# Altium PCB 如意硬件电源模块0831.PcbDoc
Units mm, origin at the board's own origin, x right, y up, seen from the top; angles counter-clockwise.
Board outline 40 x 49 mm, 2 copper layers (Top Layer, Bottom Layer); 30 components, 15 nets, 85 pads, 62 vias.
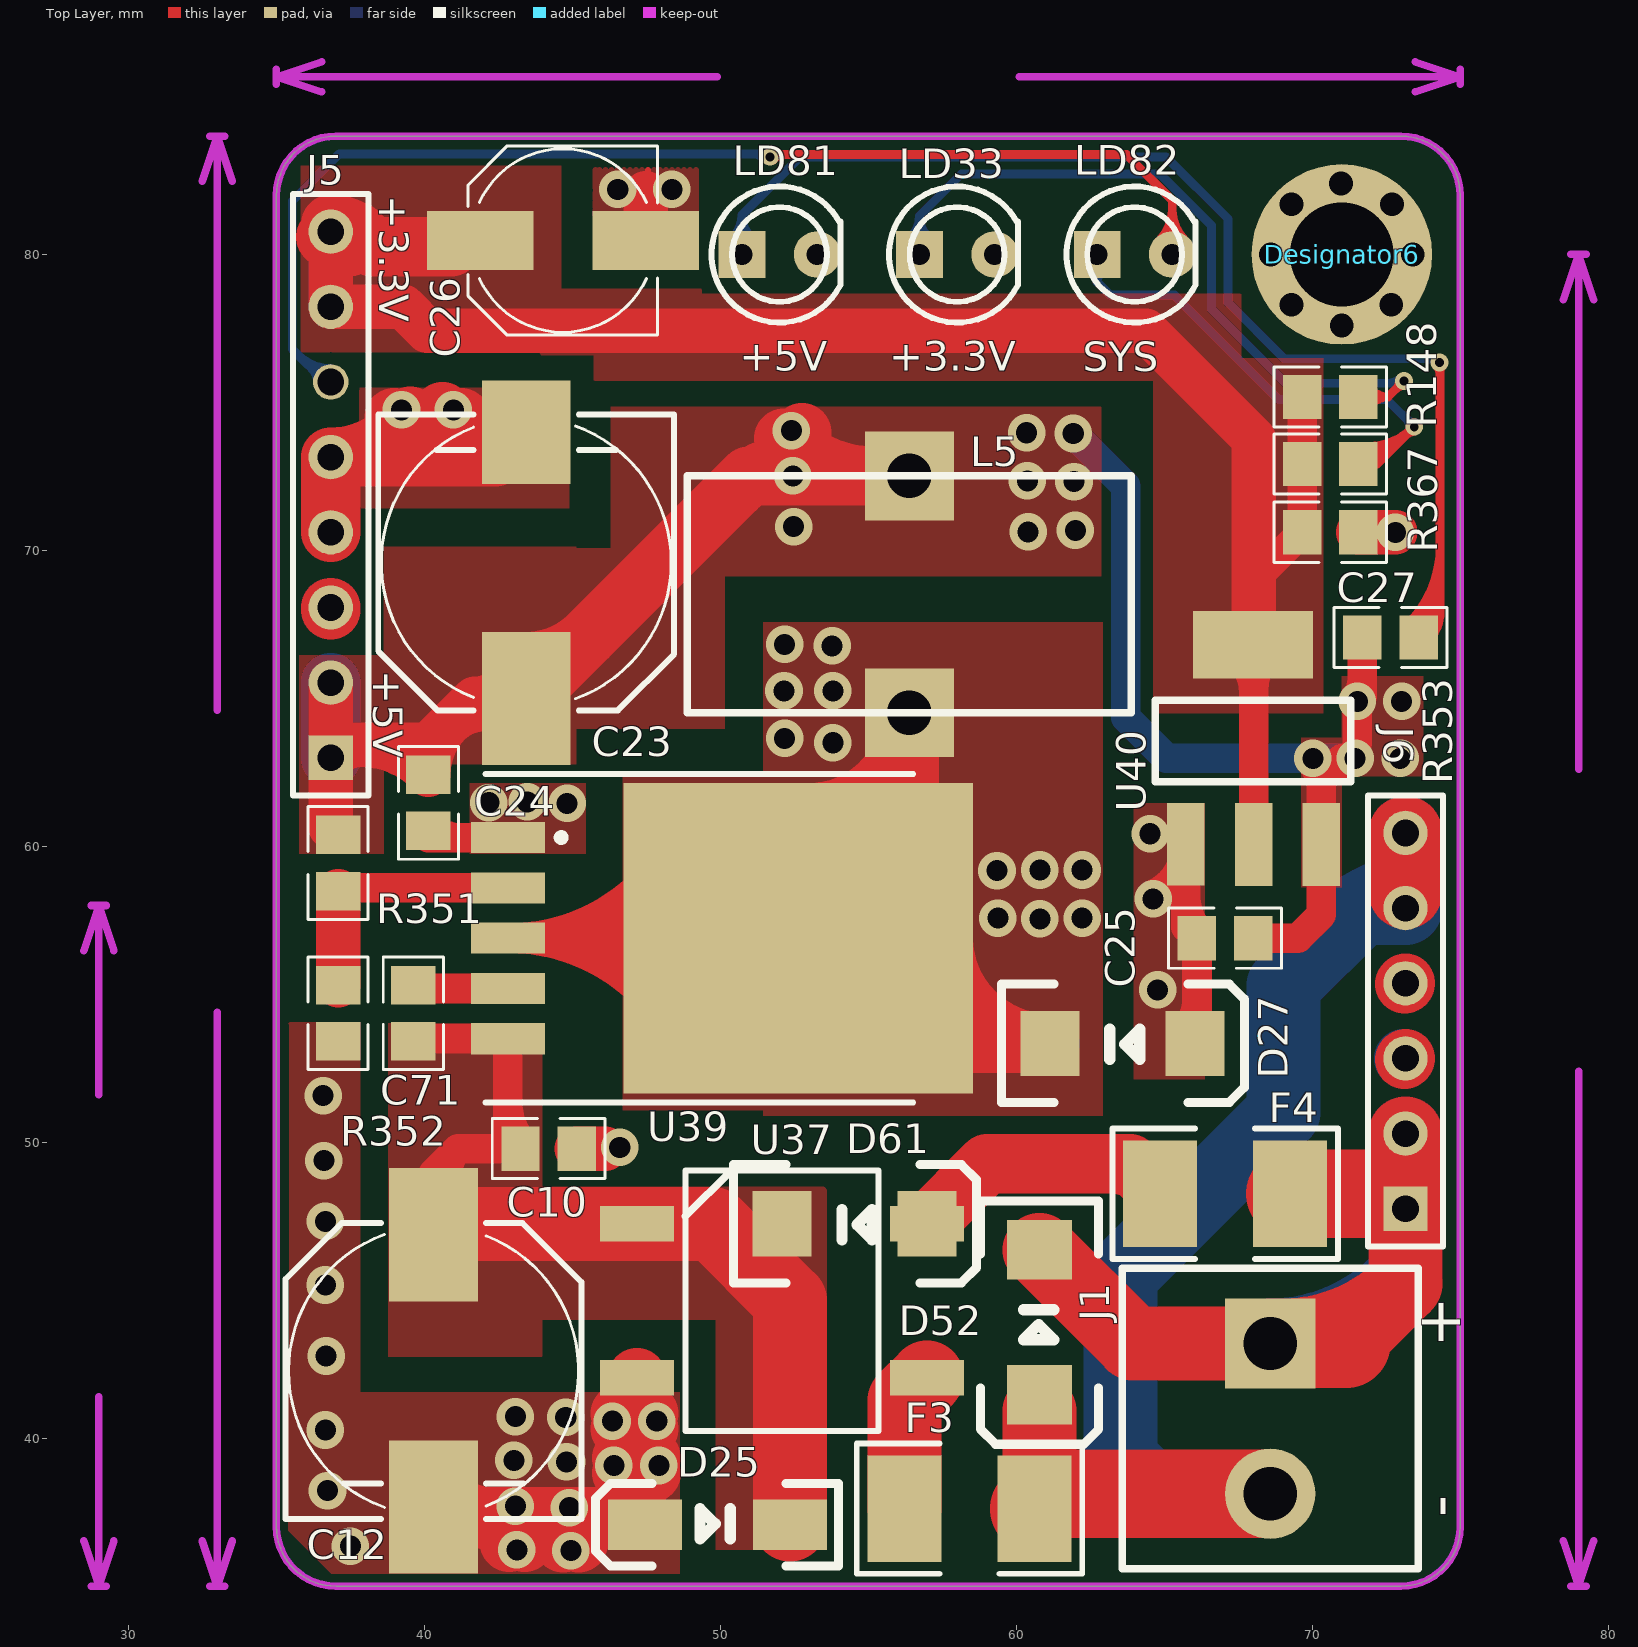
[diagram p0: Top Layer view]
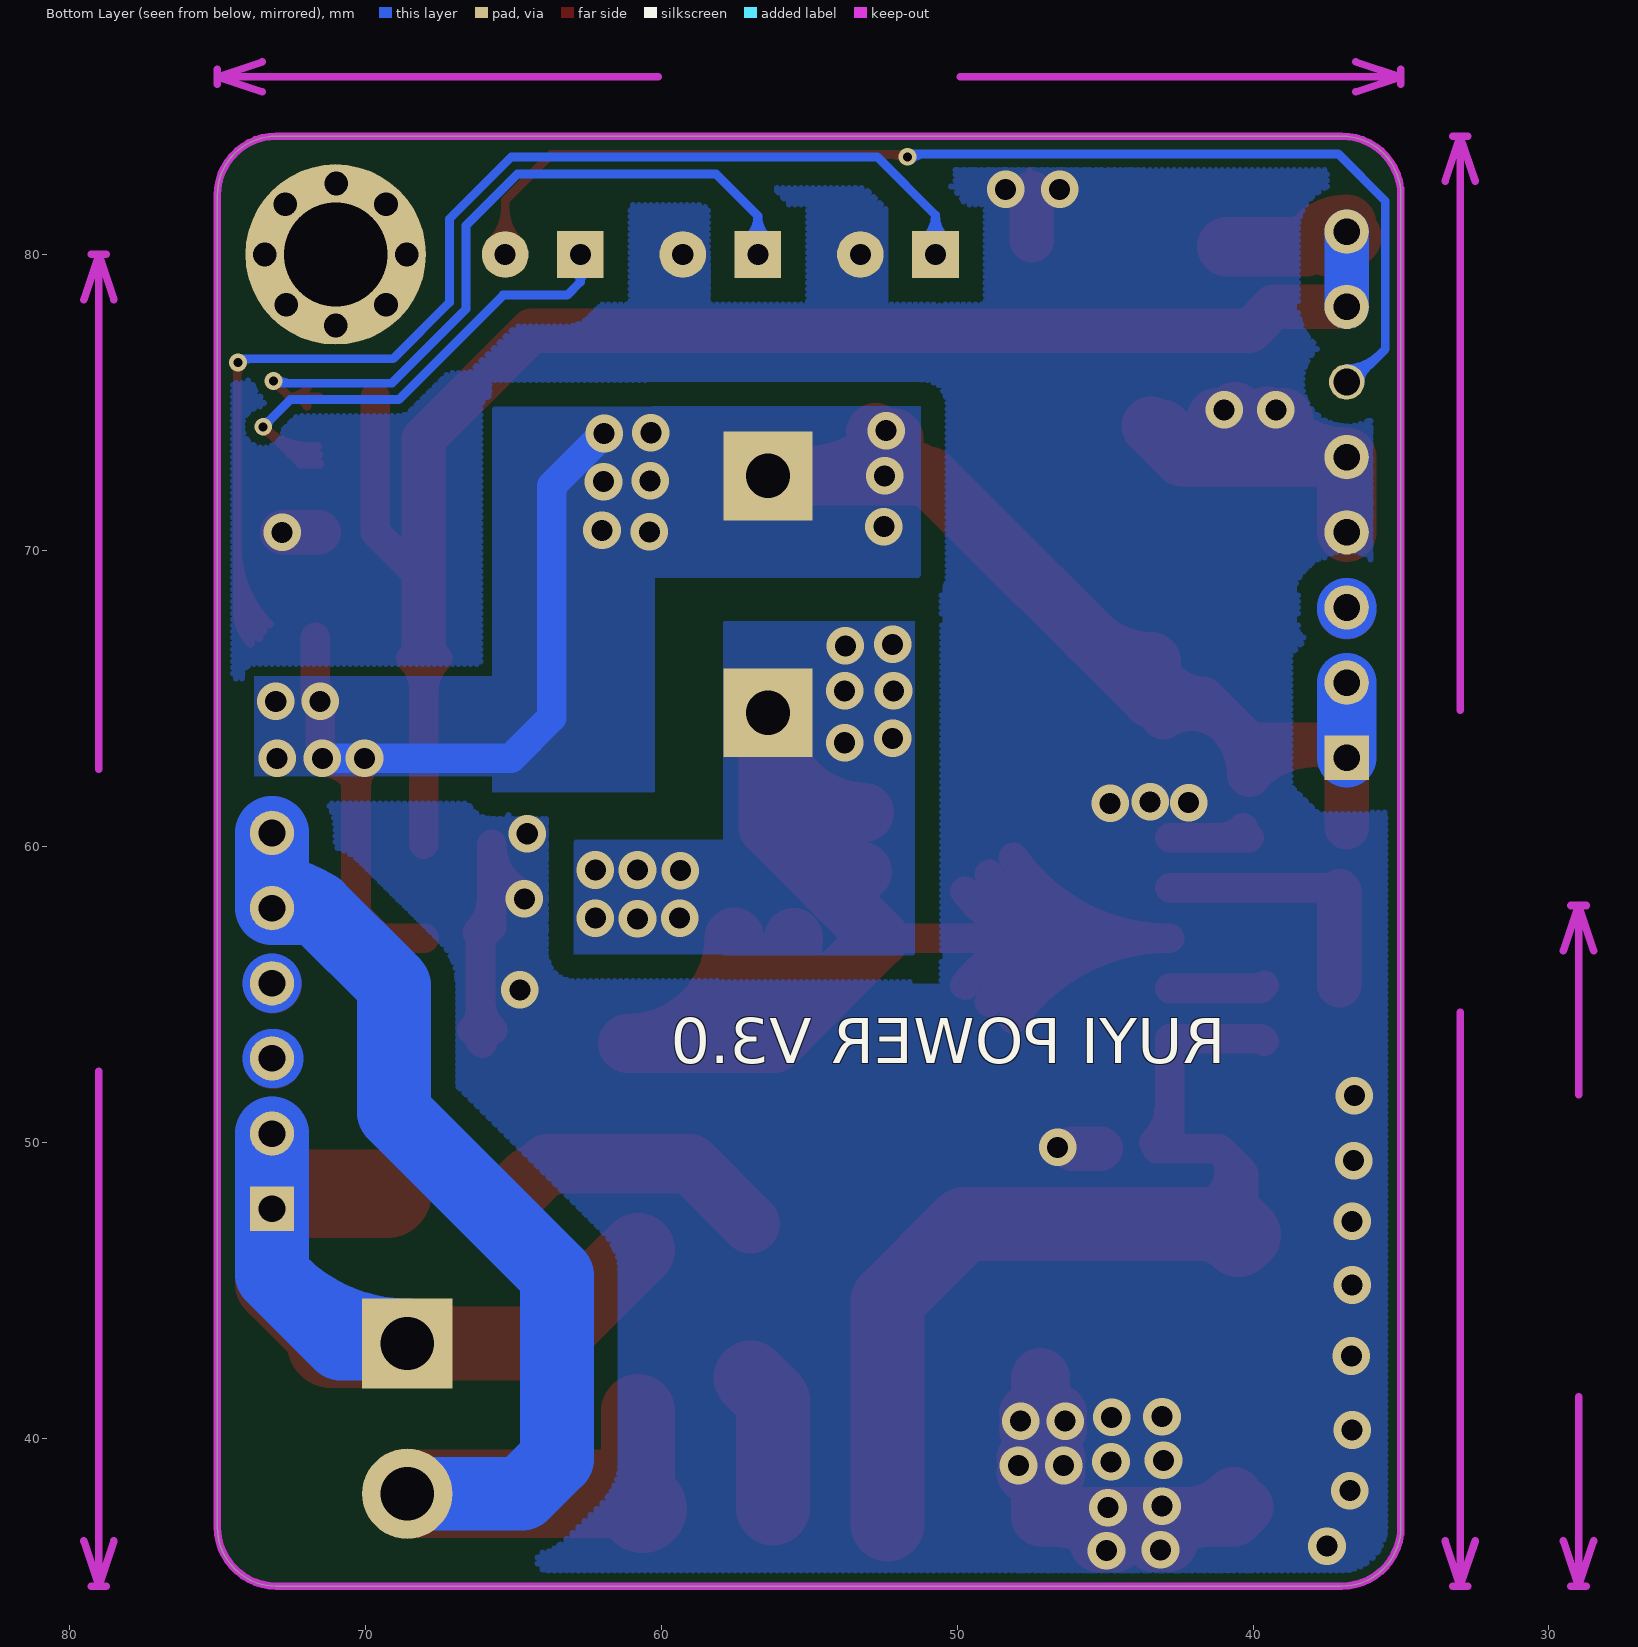
[diagram p1: Bottom Layer view, seen from below]

## Layer stack, top to bottom
Top Layer: signal copper 0.0356
Dielectric: dielectric 0.32, FR-4, Dk 4.8
Bottom Layer: signal copper 0.0356

## Board outline
35,37 35,82 cw(c37,82) 37,84 73,84 cw(c73,82) 75,82 75,37 cw(c73,37) 73,35 37,35 cw(c37,37)

## Design rules (kind name [scope] priority, off if disabled: settings)
Clearance Clearance_1 [InPolygon] p1: gap=0.3
Clearance [All] p2: gap=0.254
ComponentClearance [All] p1: gap=0 collisioncheckmode=3 verticalgap=0 showdistances=FALSE
FabricationTestpoint [(IsPad And (OnTopLayer Or OnBottomLayer))] p1: side=3 testpointundercomponent=TRUE minsize=1.016 maxsize=2.54 preferedsize=1.524 minholesize=0 maxholesize=1.016 preferedholesize=0.813 testpointgrid=0.025 allowsidetop=TRUE allowsidebottom=TRUE usegrid=TRUE gridtolerance=0
PolygonConnect PolygonConnect_1 [IsVia Or IsSMTPin Or IsThruPin vs IsPoly] p1: connectstyle=Direct reliefconductorwidth=0.254 reliefentries=4 polygonreliefangle="90 Angle"
PolygonConnect [All] p2: connectstyle=Relief reliefconductorwidth=0.254 reliefentries=4 polygonreliefangle="90 Angle"
RoutingVias [All] p1: holewidth=0.711 width=1.27 viastyle="Through Hole" minholewidth=0.3 minwidth=0.6 maxholewidth=0.711 maxwidth=1.27
SilkToSilkClearance [All] p1: silktosilkclearance=0
SilkscreenOverComponentPads [All] p1: minsilkscreentomaskgap=0
SolderMaskExpansion [All] p1: expansion=0.102
Width Width_2 [InNet('VS+')  Or InNet('VS-')  Or InNet(NetF3_2)  Or InNet('+24V')] p1: maxlimit=3 minlimit=1 preferedwidth=2
Width Width_1 [All] p2: maxlimit=2 minlimit=0.3 preferedwidth=1.5
24 further rules are at their usual default settings.

## Components (designator, comment, footprint, x,y, rotation, side; value= is the part's Value field where it differs from the comment)
C10 "1uf" 0805-1 44.196,49.784 r0 top
C12 "220uF/50V" C-RB-S10#1 40.307,42.272 r270 top
C23 "220uf/50V" C-RB-S10#2 43.438,69.596 r90 top
C24 "1uf" 0805-1 40.132,61.468 r270 top
C25 "0.1uf" 0805-1 67.056,56.896 r0 top
C26 "10uf" C-RB-S6 44.679,80.472 r0 top
C27 "0.1uf" 0805-1 70.612,70.612 r180 top
C71 "1uf" 0805-1 39.624,54.356 r90 top
D25 "FR104" DIODETP-5 47.452,37.075 r180 top
D27 "IN5824" SMB 66.04,53.34 r0 top
D52 "P6KE33CA" SMB 60.785,41.464 r270 top
D61 "IN4007" SMB 56.986,47.244 r0 top
Designator6 "Comment" Hole-3MM 71,80 r0 top
F3 "" 1812 58.42,37.617 r180 top
F4 "" 1812 67.056,48.26 r180 top
J1 "CON2" JK126-2 68.58,43.23 r270 top
J5 "Header 8" HDR1X8 36.834,62.992 r90 top
J6 "Header 6" HDR1X6 73.152,47.752 r90 top
L5 "47uH/5A" L1-47uH/5A 56.388,64.516 r90 top
LD33 "LED" LED_Z1 58,80 r180 top
LD81 "LED" LED_Z1 52,80 r180 top
LD82 "LED" LED_Z1 64,80 r180 top
R148 "330" 0805-1 70.612,75.184 r0 top
R351 "10K" 0805-1 37.084,59.436 r270 top
R352 "3.3K" 0805-1 37.084,54.356 r270 top
R353 "510" 0805-1 72.644,67.056 r0 top
R367 "220" 0805-1 70.612,72.919 r0 top
U37 "DB157S" SOP-DBS 47.186,47.244 r0 top
U39 "XL4015" TO-263-5 47.244,56.896 r270 top
U40 "LM1117-3.3" ASM1117 68.072,63.5 r0 top

## Footprints (in the part's own frame and the unit in brackets; to place one, negate y for a bottom-side part, rotate by r counter-clockwise, add the part's x,y. Pads: shape width x height; smd on the part's side, far side on the other; paste and mask are expansions set on the pad)
0805-1 [mm] "贴片带丝印"
  rect 1.3x1.5 smd: 1(-0.95,0) 2(0.95,0)
  silkscreen extent -1.91,-1.02 1.91,1.02, body extent -1.14,-0.51 1.14,0.51, height 1
1812 [mm] "保险丝"
  rect 2.5x3.6 smd: 1(-2.2,0) 2(2.2,0)
  silkscreen extent -3.81,-2.2 3.81,2.2, body extent -2.54,-1.65 2.67,1.65, height 1.2
ASM1117 [mil]
  rect 50x110 smd: 1(-92.17,-135.19) 2(-1.93,-135.31) 3(88.23,-135.31)
  rect 160x90 smd: 4(-2.72,130.44)
  silkscreen extent -133,-52 127,57
C-RB-S6 [mm] "贴片电解"
  rect 3.6x2 smd: 1(-2.794,0) 2(2.794,0)
  silkscreen extent -3.2,-3.2 3.2,3.2
C-RB-S10#1 [mm] "贴片电解"
  rect 4.5x3 smd: 1(-4.6,0) 2(4.6,0)
  silkscreen extent -5,-5 5,5
C-RB-S10#2 [mm] "贴片电解"
  rect 4.5x3 smd: 1(-4.6,0)
  rect 3.5x3 smd: 2(4.4,0)
  silkscreen extent -5,-5 5,5
DIODETP-5 [mm]
  rect 2.5x1.702 smd: 1(0,0) 2(-4.9,0)
  silkscreen extent -6.54,-1.39 1.67,1.4
HDR1X6 [mm] "Connector; Header; 6 Position"
  rect 1.5x1.5 hole 0.9: 1(0,0)
  round 1.5 hole 0.9: 2(2.54,0) 3(5.08,0) 4(7.62,0) 5(10.16,0) 6(12.7,0)
  silkscreen extent -1.27,-1.27 13.97,1.27
HDR1X8 [mm] "Connector; Header; 8 Position"
  rect 1.5x1.5 hole 0.9: 1(0,0)
  round 1.5 hole 0.9: 2(2.54,0) 3(5.08,0) 4(7.62,0) 5(10.16,0) 7(15.24,0) 8(17.78,0)
  round 1.2 hole 0.9: 6(12.7,0)
  silkscreen extent -1.27,-1.27 19.05,1.27
Hole-3MM [mm]
  round 6.1 hole 3.5: 0(0,0)
  round 1 hole 0.8: 2(-2.4,0) 3(-0.025,2.4) 4(2.4,0) 5(0,-2.4) 6(-1.7,1.7) 7(1.7,1.7) 8(1.675,-1.7) 9(-1.7,-1.7)
JK126-2 [mil]
  rect 120x120 hole 70.87: 1(1.13,0)
  round 120 hole 70.87: 2(201.13,0)
  silkscreen extent -99,-197 301,197
L1-47uH/5A [mm]
  rect 3x3 hole 1.5: 1(0,0) 2(8,0)
  silkscreen extent 0,-7.5 8,7.5
LED_Z1 [mil] "直径3MM二极管"
  rect 62x62 hole 28: 1(50,0)
  round 62 hole 28: 2(-50,0)
  silkscreen extent -81,-91 90,91
SMB [mm]
  rect 2x2.2 smd: 1(0,0) 2(-4.9,0)
  silkscreen extent -6.54,-1.99 1.67,2
SOP-DBS [mm]
  rect 2.5x1.2 smd: 1(0,0) 2(0,-5.2) 3(9.8,-5.2) 4(9.8,0)
  silkscreen extent 1.64,-7 8.17,1.8
TO-263-5 [mm] "贴片LM2596"
  rect 1.05x2.5 smd: 1(-3.4,-4.425) 2(-1.7,-4.425) 3(0,-4.425) 4(1.7,-4.425) 5(3.4,-4.425)
  rect 10.5x11.8 smd: 6(0,5.387)
  silkscreen extent -5.55,-5.18 5.55,9.28, body extent -5.33,-4.7 5.33,10.29, height 3

## Part data
C10 C24 C71: library part CAP, "Capacitor"
C12 C23: library part ELECTRO1, "Electrolytic Capacitor"
C25 C27: library part CAP0, "CAP"
C26: library part ECAP
D25 D61: library part DIODE, "Diode"
D27: library part ZENER2, "Zener Diode"
D52: library part TVS
F3 F4: library part FUSE1, "Fuse"
J1: "Connector"
J5: "Header, 8-Pin"
J6: "接插件"
L5: library part INDUCTOR
R148 R351 R352 R353 R367: library part RES-2
U37: library part MB6S
U40: library part LM1117

## Via types
v1: diameter 1.27, hole 0.711, Top Layer to Bottom Layer, 58 vias
v2: diameter 0.6, hole 0.3, Top Layer to Bottom Layer, 4 vias

## Nets (pads, with @x,y where several pads share a name; then routed paths per layer and width w, separated by ;. In a path a pad name is that pad's centre, name@x,y a point inside that pad or via, vN(x,y) a via of type N, cw(c..) or ccw(c..) an arc to the next point about the centre after c; other vN are vias at no path point)
+3.3V: C26.1 C27.2 J5.7 J5.8 R148.1 R367.1 U40.2 U40.4 | length 82
  Top Layer w1: U40.2 68.023,66.05 U40.4@68.023,66.813 ; 68.023,68.973 C27.2 R367.1 R148.1 ; U40.4@67.548,66.359 cw(c66.402,65.213) 68.023,65.213 ; U40.4@67.548,66.359 cw(c66.402,65.213) 68.023,65.213 ; U40.4@67.548,66.359 cw(c66.402,65.213) 68.023,65.213 ; 68.023,65.309 cw(c69.507,65.309) U40.4@68.458,66.359 ; 68.023,65.309 cw(c69.507,65.309) U40.4@68.458,66.359 ; 68.023,65.309 cw(c69.507,65.309) U40.4@68.458,66.359
  Top Layer w1.5: J5.8 J5.7 39.293,78.232 40.1,77.425 64.375,77.425 68.023,73.777 68.023,68.973 U40.4@68.023,66.813
  Top Layer w2: 37.719,80.772 38.227,80.264 C26.1@40.894,80.264 ; J5.8@36.657,80.595 ccw(c37.457,81.395) 37.457,80.264 ; J5.8@36.657,80.595 ccw(c37.457,81.395) 37.457,80.264 ; J5.8@36.657,80.595 ccw(c37.457,81.395) 37.457,80.264 ; J5.8@36.657,80.595 ccw(c37.457,81.395) 37.457,80.264 ; J5.8@36.657,80.595 ccw(c37.457,81.395) 37.457,80.264 ; J5.8@36.657,80.595 ccw(c37.457,81.395) 37.457,80.264 ; J5.8@36.834,81.022 cw(c36.834,79.489) 37.918,80.573 ; J5.8@36.834,81.022 cw(c36.834,79.489) 37.918,80.573 ; J5.8@36.834,81.022 cw(c36.834,79.489) 37.918,80.573 ; J5.8@36.834,81.022 cw(c36.834,79.489) 37.918,80.573 ; J5.8@36.834,81.022 cw(c36.834,79.489) 37.918,80.573 ; J5.8@36.834,81.022 cw(c36.834,79.489) 37.918,80.573
  Bottom Layer w1.5: J5.7 J5.8
+5V: C23.1 C24.1 C25.2 J5.1 J5.2 L5.2 R351.1 R353.1 U40.3 | length 149.1
  Top Layer w1: C25.2 69.521,56.896 70.313,57.688 U40.3 70.313,62.263 71.025,62.975 v1(71.45,62.975) ; v1@71.525,63.475 v1(71.525,64.9) 71.694,65.069 R353.1 ; v1@69.93,62.88 cw(c69.004,61.954) 70.313,61.954 ; v1@69.93,62.88 cw(c69.004,61.954) 70.313,61.954 ; v1@69.93,62.88 cw(c69.004,61.954) 70.313,61.954 ; 70.494,62.444 cw(c71.45,61.488) v1@71.45,62.84 ; 70.494,62.444 cw(c71.45,61.488) v1@71.45,62.84 ; 70.494,62.444 cw(c71.45,61.488) v1@71.45,62.84 ; v1@71.43,64.995 ccw(c70.791,65.634) 71.694,65.634 ; v1@71.43,64.995 ccw(c70.791,65.634) 71.694,65.634 ; v1@71.43,64.995 ccw(c70.791,65.634) 71.694,65.634
  Top Layer w1.5: R351.1@36.834,60.636 J5.1 ; J5.2 J5.1 ; C23.1 41.694,64.996 ; J5.1 cw(c37.901,61.925) 37.901,63.434 ; J5.1 cw(c37.901,61.925) 37.901,63.434 ; J5.1 cw(c37.901,61.925) 37.901,63.434 ; J5.1 37.276,63.434 40.132,63.434 41.694,64.996 ; 37.821,63.434 cw(c37.821,60.207) C24.1@40.103,62.489 ; 37.821,63.434 cw(c37.821,60.207) C24.1@40.103,62.489 ; 37.821,63.434 cw(c37.821,60.207) C24.1@40.103,62.489 ; C24.1 cw(c42.585,62.418) 40.85,64.152 ; C24.1 cw(c42.585,62.418) 40.85,64.152 ; C24.1 cw(c42.585,62.418) 40.85,64.152 ; 40.822,64.124 cw(c42.077,62.869) C23.1@43.034,64.364 ; 40.822,64.124 cw(c42.077,62.869) C23.1@43.034,64.364 ; 40.822,64.124 cw(c42.077,62.869) C23.1@43.034,64.364 ; 40.858,64.16 cw(c42.986,62.032) C23.1@43.588,64.981 ; 40.858,64.16 cw(c42.986,62.032) C23.1@43.588,64.981 ; 40.858,64.16 cw(c42.986,62.032) C23.1@43.588,64.981 ; 41.694,64.996 cw(c41.694,63.344) C23.1@42.894,64.48 ; 41.694,64.996 ccw(c41.694,66.648) C23.1@42.894,65.512 ; 41.694,64.996 ccw(c41.694,66.648) C23.1@42.894,65.512 ; 41.694,64.996 cw(c41.694,63.344) C23.1@42.894,64.48 ; 41.694,64.996 ccw(c41.694,66.648) C23.1@42.894,65.512 ; 41.694,64.996 cw(c41.694,63.344) C23.1@42.894,64.48
  Top Layer w2: C23.1 50.958,72.516 ; L5.2 50.958,72.516 ; C23.1@43.438,66.246 ccw(c43.438,69.264) 45.572,67.13 ; C23.1@43.438,66.246 ccw(c43.438,69.264) 45.572,67.13 ; C23.1@43.438,66.246 ccw(c43.438,69.264) 45.572,67.13 ; 50.526,72.084 cw(c52.45,70.16) v1@52.45,72.881 ; 50.526,72.084 cw(c52.45,70.16) v1@52.45,72.881 ; 50.526,72.084 cw(c52.45,70.16) v1@52.45,72.881 ; 50.526,72.084 cw(c52.45,70.16) v1@52.45,72.881 ; 50.526,72.084 cw(c52.45,70.16) v1@52.45,72.881 ; 50.526,72.084 cw(c52.45,70.16) v1@52.45,72.881 ; 50.958,72.516 ccw(c50.958,74.355) v1@52.757,73.974 ; 50.958,72.516 ccw(c50.958,74.355) v1@52.757,73.974 ; 50.958,72.516 ccw(c50.958,74.355) v1@52.757,73.974 ; v1@52.142,73.792 ccw(c55.222,76.872) L5.2@55.222,72.516 ; v1@52.142,73.792 ccw(c55.222,76.872) L5.2@55.222,72.516 ; v1@52.142,73.792 ccw(c55.222,76.872) L5.2@55.222,72.516
  Bottom Layer w1: v1(61.925,73.95) 63.7,72.175 63.7,64.35 65.075,62.975 v1(70.025,62.975) v1(71.45,62.975)
  Bottom Layer w2: J5.1 J5.2
  other v1: 72.975,62.975 73.025,64.9 60.4,70.625 62,70.675 52.475,70.8 61.95,72.325 60.375,72.35 52.45,72.516 60.35,73.975 52.4,74.05
+24V: C10.1 C12.1 C71.1 D25.2 D61.2 U37.1 U39.5 | length 47
  Top Layer w1: C71.1 39.714,53.496 U39.5 42.819,50.211 C10.1 41.134,49.784 ; C12.1 40.307,48.957 41.134,49.784 ; C12.1@41.071,48.268 cw(c41.927,48.991) 41.134,49.784 ; C12.1@41.071,48.268 cw(c41.927,48.991) 41.134,49.784 ; C12.1@41.071,48.268 cw(c41.927,48.991) 41.134,49.784 ; 42.819,51.277 ccw(c44.639,51.277) C10.1@43.352,49.99 ; 42.819,51.277 ccw(c44.639,51.277) C10.1@43.352,49.99 ; 42.819,51.277 ccw(c44.639,51.277) C10.1@43.352,49.99
  Top Layer w2.5: C12.1 40.679,47.244 U37.1 49.756,47.244 52.352,44.648 D25.2 ; C12.1@40.484,46.695 cw(c41.809,45.37) 41.809,47.244 ; C12.1@40.484,46.695 cw(c41.809,45.37) 41.809,47.244 ; C12.1@40.484,46.695 cw(c41.809,45.37) 41.809,47.244
GND: C10.2 C12.2 C23.2 C24.2 C25.1 C26.2 C27.1 D25.1 D27.1 J5.4 J5.5 LD33.2 LD81.2 R352.2 U37.2 U39.1 U40.1 | length 165.4
  Top Layer w1: C24.2@40.132,60.296 U39.1 ; D27.1 66.106,53.406 C25.1 65.731,57.271 U40.1 ; C24.2@40.338,60.624 ccw(c41.13,61.416) 41.13,60.296 ; C24.2@40.338,60.624 ccw(c41.13,61.416) 41.13,60.296 ; C24.2@40.338,60.624 ccw(c41.13,61.416) 41.13,60.296 ; v1@64.574,58.35 ccw(c63.88,60.066) U40.1 ; v1@64.574,58.35 ccw(c63.88,60.066) U40.1 ; v1@64.574,58.35 ccw(c63.88,60.066) U40.1 ; D27.1@65.686,53.794 ccw(c64.674,54.806) 66.106,54.806 ; D27.1@65.686,53.794 ccw(c64.674,54.806) 66.106,54.806 ; D27.1@65.686,53.794 ccw(c64.674,54.806) 66.106,54.806 ; 65.731,58.264 ccw(c67.374,58.264) C25.1@66.212,57.102 ; 65.731,58.264 ccw(c67.374,58.264) C25.1@66.212,57.102 ; 65.731,58.264 ccw(c67.374,58.264) C25.1@66.212,57.102 ; 66.106,54.488 ccw(c67.088,54.488) D27.1@66.394,53.794 ; 66.106,54.488 ccw(c67.088,54.488) D27.1@66.394,53.794 ; 66.106,54.488 ccw(c67.088,54.488) D27.1@66.394,53.794
  Top Layer w1.5: C10.2 v1@46.116,49.784 ; C26.2 47.473,82.075 ; C27.1 v1(72.812,70.612)
  Top Layer w2: J5.4 J5.5 ; C12.2 40.638,37.341 47.186,37.341 U37.2 ; C23.2@43.438,74.196 C23.2@42.394,73.152 ; J5.5 ccw(c36.834,76.452) v1@39.522,74.538 ; J5.5 ccw(c36.834,76.452) v1@39.522,74.538 ; J5.5 ccw(c36.834,76.452) v1@39.522,74.538 ; J5.5 C23.2@42.394,73.152 ; 37.998,73.152 ccw(c37.998,77.727) v1@41.233,74.492 ; 37.998,73.152 ccw(c37.998,77.727) v1@41.233,74.492 ; 37.998,73.152 ccw(c37.998,77.727) v1@41.233,74.492 ; v1@38.967,74.492 ccw(c42.202,77.727) C23.2@42.202,73.152 ; v1@38.967,74.492 ccw(c42.202,77.727) C23.2@42.202,73.152 ; v1@38.967,74.492 ccw(c42.202,77.727) C23.2@42.202,73.152 ; v1@40.614,74.699 ccw(c42.394,74.95) C23.2@42.394,73.152 ; v1@40.614,74.699 ccw(c42.394,74.95) C23.2@42.394,73.152 ; v1@40.614,74.699 ccw(c42.394,74.95) C23.2@42.394,73.152 ; C12.2@40.661,38.026 ccw(c42.313,39.678) 42.313,37.341 ; C12.2@40.661,38.026 ccw(c42.313,39.678) 42.313,37.341 ; C12.2@40.661,38.026 ccw(c42.313,39.678) 42.313,37.341 ; 40.797,73.152 ccw(c40.797,76.387) C23.2@43.084,74.1 ; 40.797,73.152 ccw(c40.797,76.387) C23.2@43.084,74.1 ; 40.797,73.152 ccw(c40.797,76.387) C23.2@43.084,74.1 ; C12.2@41.312,37.341 cw(c41.312,34.412) v1@43.383,36.483 ; C12.2@41.312,37.341 cw(c41.312,34.412) v1@43.383,36.483 ; C12.2@41.312,37.341 cw(c41.312,34.412) v1@43.383,36.483 ; v1@42.867,36.483 cw(c44.938,34.412) v1@44.938,37.341 ; v1@42.867,36.483 cw(c44.938,34.412) v1@44.938,37.341 ; v1@42.867,36.483 cw(c44.938,34.412) v1@44.938,37.341 ; v1@43.077,37.341 cw(c43.077,34.327) v1@45.208,36.458 ; v1@43.077,37.341 cw(c43.077,34.327) v1@45.208,36.458 ; v1@43.077,37.341 cw(c43.077,34.327) v1@45.208,36.458 ; v1@44.692,36.458 cw(c46.823,34.327) D25.1@46.823,37.341 ; v1@44.692,36.458 cw(c46.823,34.327) D25.1@46.823,37.341 ; v1@44.692,36.458 cw(c46.823,34.327) D25.1@46.823,37.341 ; v1@46.608,40.317 ccw(c45.213,41.712) U37.2@47.186,41.712 ; v1@46.608,40.317 ccw(c45.213,41.712) U37.2@47.186,41.712 ; v1@46.608,40.317 ccw(c45.213,41.712) U37.2@47.186,41.712 ; v1@46.608,40.833 cw(c45.213,39.438) 47.186,39.438 ; v1@46.608,40.833 cw(c45.213,39.438) 47.186,39.438 ; v1@46.608,40.833 cw(c45.213,39.438) 47.186,39.438 ; v1@46.658,38.817 ccw(c45.384,40.091) 47.186,40.091 ; v1@46.658,38.817 ccw(c45.384,40.091) 47.186,40.091 ; v1@46.658,38.817 ccw(c45.384,40.091) 47.186,40.091 ; v1@46.658,39.333 cw(c45.384,38.059) 47.186,38.059 ; v1@46.658,39.333 cw(c45.384,38.059) 47.186,38.059 ; v1@46.658,39.333 cw(c45.384,38.059) 47.186,38.059 ; 47.186,38.172 cw(c48.828,38.172) v1@47.667,39.333 ; 47.186,38.172 cw(c48.828,38.172) v1@47.667,39.333 ; 47.186,38.172 cw(c48.828,38.172) v1@47.667,39.333 ; 47.186,39.853 cw(c48.572,39.853) v1@47.592,40.833 ; 47.186,39.853 cw(c48.572,39.853) v1@47.592,40.833 ; 47.186,39.853 cw(c48.572,39.853) v1@47.592,40.833 ; 47.186,39.978 ccw(c48.828,39.978) v1@47.667,38.817 ; 47.186,39.978 ccw(c48.828,39.978) v1@47.667,38.817 ; 47.186,39.978 ccw(c48.828,39.978) v1@47.667,38.817 ; 47.186,41.297 ccw(c48.572,41.297) v1@47.592,40.317 ; 47.186,41.297 ccw(c48.572,41.297) v1@47.592,40.317 ; 47.186,41.297 ccw(c48.572,41.297) v1@47.592,40.317
  other v1: 44.95,36.2 43.125,36.225 37.5,36.35 44.9,37.65 43.075,37.7 36.725,38.225 46.4,39.075 47.925,39.075 44.8,39.2 43.025,39.25 36.65,40.275 46.35,40.575 47.85,40.575 44.775,40.7 43.075,40.725 36.675,42.775 36.65,45.175 36.65,47.325 36.6,49.375 46.6,49.825 36.575,51.575 64.775,55.15 64.625,58.225 64.525,60.425 44.825,61.45 42.175,61.475 43.475,61.5 39.225,74.75 40.975,74.75 46.533,82.2 48.362,82.2
NetC71_2: C71.2 U39.4 | length 3.2
  Top Layer w1: C71.2 39.734,55.196 U39.4
NetD27_2: D27.2 L5.1 U39.3 U39.6 | length 181.4
  Top Layer w1: U39.6 U39.3 ; U39.3 cw(c42.819,50.436) U39.6@48.099,54.159 ; U39.3 ccw(c42.819,63.356) U39.6@48.099,59.633 ; U39.3 ccw(c42.819,63.356) U39.6@48.099,59.633 ; U39.3 cw(c42.819,50.436) U39.6@48.099,54.159 ; U39.3 ccw(c42.819,63.356) U39.6@48.099,59.633 ; U39.3 cw(c42.819,50.436) U39.6@48.099,54.159 ; 44.748,56.896 cw(c44.748,51.796) U39.6@48.916,54.735 ; 44.748,56.896 ccw(c44.748,61.996) U39.6@48.916,59.057 ; 44.748,56.896 ccw(c44.748,61.996) U39.6@48.916,59.057 ; 44.748,56.896 cw(c44.748,51.796) U39.6@48.916,54.735 ; 44.748,56.896 ccw(c44.748,61.996) U39.6@48.916,59.057 ; 44.748,56.896 cw(c44.748,51.796) U39.6@48.916,54.735 ; 46.677,56.896 cw(c46.677,53.156) U39.6@49.734,55.311 ; 46.677,56.896 ccw(c46.677,60.636) U39.6@49.734,58.481 ; 46.677,56.896 ccw(c46.677,60.636) U39.6@49.734,58.481 ; 46.677,56.896 cw(c46.677,53.156) U39.6@49.734,55.311 ; 46.677,56.896 ccw(c46.677,60.636) U39.6@49.734,58.481 ; 46.677,56.896 cw(c46.677,53.156) U39.6@49.734,55.311
  Top Layer w2: U39.6@53.132,61.143 ccw(c53.013,64.516) L5.1 ; U39.6@53.132,61.143 ccw(c53.013,64.516) L5.1 ; U39.6@53.132,61.143 ccw(c53.013,64.516) L5.1 ; U39.6@53.202,59.145 ccw(c53.086,62.444) 56.388,62.444 ; U39.6@53.202,59.145 ccw(c53.086,62.444) 56.388,62.444 ; U39.6@53.202,59.145 ccw(c53.086,62.444) 56.388,62.444 ; U39.6@55.531,56.911 ccw(c59.126,56.935) 59.126,53.34 ; U39.6@55.531,56.911 ccw(c59.126,56.935) 59.126,53.34 ; U39.6@55.531,56.911 ccw(c59.126,56.935) 59.126,53.34 ; L5.1 56.388,60.653 U39.6 56.187,53.34 D27.2 ; U39.6@57.531,56.925 ccw(c61.14,56.949) D27.2 ; U39.6@57.531,56.925 ccw(c61.14,56.949) D27.2 ; U39.6@57.531,56.925 ccw(c61.14,56.949) D27.2
  other v1: 60.8,57.55 59.375,57.575 62.225,57.575 59.35,59.175 60.8,59.2 62.225,59.2 53.8,63.5 52.175,63.65 52.15,65.25 53.8,65.25 53.775,66.775 52.175,66.825
NetD61_1: D61.1 F4.2 U37.4 | length 10.9
  Top Layer w2: D61.1 59.017,49.275 63.841,49.275 F4.2 ; 63.13,49.275 cw(c63.13,47.084) F4.2@64.679,48.633
NetF3_2: F3.2 U37.3 | length 4.7
  Top Layer w2.5: F3.2 56.22,41.278 U37.3
NetLD33_1: LD33.1 R148.2 | length 36.1
  Top Layer w0.3: R148.2 72.559,75.184 ; v2@72.95,75.725 cw(c72.588,75.725) 72.844,75.469 cw(c73.1,75.213) v2@73.1,75.575 ; v2@73.187,75.813 72.559,75.184 ; R148.2@71.963,74.885 cw(c72.559,74.44) 72.559,75.184 ; R148.2@71.963,74.885 cw(c72.559,74.44) 72.559,75.184 ; R148.2@71.963,74.885 cw(c72.559,74.44) 72.559,75.184 ; R148.2@71.963,75.483 ccw(c72.559,75.928) 72.559,75.184 ; R148.2@71.963,75.483 ccw(c72.559,75.928) 72.559,75.184 ; R148.2@71.963,75.483 ccw(c72.559,75.928) 72.559,75.184 ; v2@72.987,75.612 ccw(c72.773,75.825) 73.075,75.825 cw(c72.773,75.825) v2@72.987,75.612
  Bottom Layer w0.3: LD33.1 56.73,81.305 ; 72.557,75.65 ccw(c72.557,76.268) v2@72.994,75.831 ; v2@73.125,75.85 72.925,75.65 69.1,75.65 66.6,78.15 66.6,80.975 64.85,82.725 58.15,82.725 56.73,81.305 ; LD33.1@56.338,80.503 ccw(c55.713,81.305) 56.73,81.305 ; LD33.1@56.338,80.503 ccw(c55.713,81.305) 56.73,81.305 ; LD33.1@56.338,80.503 ccw(c55.713,81.305) 56.73,81.305 ; 56.73,81.305 ccw(c57.747,81.305) LD33.1@57.122,80.503 ; 56.73,81.305 ccw(c57.747,81.305) LD33.1@57.122,80.503 ; 56.73,81.305 ccw(c57.747,81.305) LD33.1@57.122,80.503
  other v2: 73.1,75.725
NetLD81_1: LD81.1 R353.2 | length 75.6
  Top Layer w0.3: R353.2 74.325,67.787 ; v2@74.194,76.244 cw(c73.878,75.928) 74.325,75.928 ; 74.325,76.048 cw(c74.602,76.048) v2@74.406,76.244 ; v2@74.325,76.35 74.325,67.787 ; R353.2@73.24,67.51 ccw(c70.622,70.128) 74.325,70.128 ; R353.2@73.24,67.51 ccw(c70.622,70.128) 74.325,70.128 ; R353.2@73.24,67.51 ccw(c70.622,70.128) 74.325,70.128 ; R353.2@73.453,67.297 ccw(c71.346,69.404) 74.325,69.404 ; R353.2@73.453,67.297 ccw(c71.346,69.404) 74.325,69.404 ; R353.2@73.453,67.297 ccw(c71.346,69.404) 74.325,69.404 ; R353.2@73.665,67.085 ccw(c72.071,68.679) 74.325,68.679 ; R353.2@73.665,67.085 ccw(c72.071,68.679) 74.325,68.679 ; R353.2@73.665,67.085 ccw(c72.071,68.679) 74.325,68.679 ; R353.2@73.734,67.636 ccw(c73.902,68.21) 74.325,67.787 ; R353.2@73.734,67.636 ccw(c73.902,68.21) 74.325,67.787 ; R353.2@73.734,67.636 ccw(c73.902,68.21) 74.325,67.787 ; R353.2@73.877,66.873 ccw(c72.795,67.955) 74.325,67.955 ; R353.2@73.877,66.873 ccw(c72.795,67.955) 74.325,67.955 ; R353.2@73.877,66.873 ccw(c72.795,67.955) 74.325,67.955 ; R353.2@74.093,67.183 cw(c74.887,67.225) 74.325,67.787 ; R353.2@74.093,67.183 cw(c74.887,67.225) 74.325,67.787 ; R353.2@74.093,67.183 cw(c74.887,67.225) 74.325,67.787
  Bottom Layer w0.3: LD81.1 50.73,81.33 ; v2(74.3,76.35) 74.175,76.475 69.058,76.475 67.154,78.379 67.154,81.204 65.058,83.3 52.7,83.3 50.73,81.33 ; LD81.1@50.331,80.497 ccw(c49.661,81.33) 50.73,81.33 ; LD81.1@50.331,80.497 ccw(c49.661,81.33) 50.73,81.33 ; LD81.1@50.331,80.497 ccw(c49.661,81.33) 50.73,81.33 ; 50.73,81.33 ccw(c51.799,81.33) LD81.1@51.129,80.497 ; 50.73,81.33 ccw(c51.799,81.33) LD81.1@51.129,80.497 ; 50.73,81.33 ccw(c51.799,81.33) LD81.1@51.129,80.497 ; 73.878,76.475 cw(c73.878,75.928) 74.265,76.315 ccw(c73.878,75.928) 73.878,76.475
NetLD82_1: LD82.1 R367.2 | length 36.4
  Top Layer w0.3: R367.2 72.194,72.919 v2(73.45,74.175) ; v2@73.3,74.175 cw(c72.938,74.175) 73.194,73.919 cw(c73.45,73.663) v2@73.45,74.025 ; R367.2@71.552,72.919 ccw(c71.674,74.156) 72.553,73.278 ; R367.2@71.552,72.919 ccw(c71.674,74.156) 72.553,73.278 ; R367.2@71.552,72.919 ccw(c71.674,74.156) 72.553,73.278 ; R367.2@71.582,73.218 ccw(c71.754,74.974) 73.001,73.726 ; R367.2@71.582,73.218 ccw(c71.754,74.974) 73.001,73.726 ; R367.2@71.582,73.218 ccw(c71.754,74.974) 73.001,73.726 ; R367.2@71.611,73.517 ccw(c71.834,75.791) v2(73.45,74.175) ; R367.2@71.611,73.517 ccw(c71.834,75.791) v2(73.45,74.175) ; R367.2@71.611,73.517 ccw(c71.834,75.791) v2(73.45,74.175)
  Bottom Layer w0.3: LD82.1 62.73,79.07 ; v2@73.3,74.175 ccw(c72.938,74.175) 73.194,74.431 ccw(c73.45,74.687) v2@73.45,74.325 ; v2(73.45,74.175) 72.529,75.096 68.871,75.096 65.342,78.625 63.175,78.625 62.73,79.07 ; LD82.1@62.5,79.406 cw(c62.37,79.07) 62.73,79.07 ; LD82.1@62.5,79.406 cw(c62.37,79.07) 62.73,79.07 ; LD82.1@62.5,79.406 cw(c62.37,79.07) 62.73,79.07 ; LD82.1@62.5,79.406 cw(c62.37,79.07) 62.73,79.07 ; LD82.1@62.5,79.406 cw(c62.37,79.07) 62.73,79.07 ; LD82.1@62.5,79.406 cw(c62.37,79.07) 62.73,79.07 ; 62.73,79.07 cw(c63.09,79.07) LD82.1@62.96,79.406 ; 62.73,79.07 cw(c63.09,79.07) LD82.1@62.96,79.406 ; 62.73,79.07 cw(c63.09,79.07) LD82.1@62.96,79.406 ; 62.73,79.07 cw(c63.09,79.07) LD82.1@62.96,79.406 ; 62.73,79.07 cw(c63.09,79.07) LD82.1@62.96,79.406 ; 62.73,79.07 cw(c63.09,79.07) LD82.1@62.96,79.406
NetR351_2: R351.2 R352.1 U39.2 | length 8.8
  Top Layer w1: R351.2@37.194,58.596 U39.2
  Top Layer w1.5: R352.1 R351.2
SYSLED: J5.6 LD82.2 | length 58.8
  Top Layer w0.3: v2@51.7,83.375 63.725,83.375 65.27,81.83 LD82.2 ; v2@51.781,83.194 cw(c52.218,82.757) 52.218,83.375 ; LD82.2@64.819,80.451 ccw(c63.731,81.539) 65.27,81.539 ; LD82.2@64.819,80.451 ccw(c63.731,81.539) 65.27,81.539 ; LD82.2@64.819,80.451 ccw(c63.731,81.539) 65.27,81.539 ; LD82.2@65.031,80.239 ccw(c64.455,80.815) 65.27,80.815 ; LD82.2@65.031,80.239 ccw(c64.455,80.815) 65.27,80.815 ; LD82.2@65.031,80.239 ccw(c64.455,80.815) 65.27,80.815 ; 65.27,80.815 ccw(c66.085,80.815) LD82.2@65.509,80.239 ; 65.27,80.815 ccw(c66.085,80.815) LD82.2@65.509,80.239 ; 65.27,80.815 ccw(c66.085,80.815) LD82.2@65.509,80.239 ; 65.27,81.539 ccw(c66.809,81.539) LD82.2@65.721,80.451 ; 65.27,81.539 ccw(c66.809,81.539) LD82.2@65.721,80.451 ; 65.27,81.539 ccw(c66.809,81.539) LD82.2@65.721,80.451
  Bottom Layer w0.3: J5.6 36.639,75.692 35.531,76.8 35.531,81.806 37.125,83.4 v2@51.675,83.4 ; 51.071,83.4 cw(c51.071,82.696) v2@51.569,83.194 ; 35.733,76.598 ccw(c36.834,77.699) J5.6@36.834,76.142 ; 35.733,76.598 ccw(c36.834,77.699) J5.6@36.834,76.142 ; 35.733,76.598 ccw(c36.834,77.699) J5.6@36.834,76.142 ; 36.204,76.127 cw(c35.768,75.692) J5.6@36.384,75.692 ; 36.204,76.127 cw(c35.768,75.692) J5.6@36.384,75.692 ; 36.204,76.127 cw(c35.768,75.692) J5.6@36.384,75.692 ; 36.245,76.086 ccw(c36.834,76.675) J5.6@36.834,75.842 ; 36.245,76.086 ccw(c36.834,76.675) J5.6@36.834,75.842 ; 36.245,76.086 ccw(c36.834,76.675) J5.6@36.834,75.842
  other v2: 51.675,83.3
VS+: D52.2 F4.1 J1.1 J6.1 J6.2 | length 57.1
  Top Layer w2.5: D52.2 63.948,43.201 J1.1 ; 71.151,43.201 73.152,45.202 ; J6.2 J6.1 73.152,45.202 ; J1.1@68.597,43.475 ccw(c68.956,49.398) 73.152,45.202 ; J1.1@68.597,43.475 ccw(c68.956,49.398) 73.152,45.202 ; J1.1@68.597,43.475 ccw(c68.956,49.398) 73.152,45.202
  Top Layer w3: J1.1 71.151,43.201 ; F4.1 71.81,48.26
  Bottom Layer w2.5: J1.1 70.826,43.201 73.152,45.527 J6.1 J6.2 ; J1.1@68.58,43.475 ccw(c68.58,49.559) 72.882,45.257 cw(c68.58,49.559) J1.1@68.58,43.475
VS-: D52.1 F3.1 J1.2 J6.5 J6.6 | length 56.7
  Top Layer w2.5: F3.1 60.785,37.782 D52.1@60.785,40.925 ; J6.5@73.152,58.45 J6.6
  Top Layer w3: F3.1 61.124,38.121 J1.2
  Bottom Layer w2.5: J1.2 64.704,38.121 63.525,39.3 63.525,45.5 69.025,51 69.025,55.3 71.637,57.912 J6.5 J6.6 ; 71.419,57.694 cw(c73.152,55.962) J6.5@73.152,58.412 ; 71.419,57.694 cw(c73.152,55.962) J6.5@73.152,58.412 ; 71.419,57.694 cw(c73.152,55.962) J6.5@73.152,58.412 ; 71.419,57.694 cw(c73.152,55.962) J6.5@73.152,58.412 ; 71.419,57.694 cw(c73.152,55.962) J6.5@73.152,58.412 ; 71.419,57.694 cw(c73.152,55.962) J6.5@73.152,58.412
pads on no net: Designator6.0 Designator6.2 Designator6.3 Designator6.4 Designator6.5 Designator6.6 Designator6.7 Designator6.8 Designator6.9 J5.3 J6.3 J6.4
copper on no net: | length 1.7
  Top Layer w0.203: 47.549,81.475 47.549,82.85
  Top Layer w2: 36.834,67.991 36.834,68.072 ; 73.116,52.796 73.152,52.832 ; 73.13,55.35 73.152,55.372
  Bottom Layer w2: 36.834,68.009 36.834,68.072 ; 73.086,52.832 73.152,52.832 ; 73.15,55.37 73.152,55.372

## Polygon pours and split planes (outlines as drawn)
+24V on Top Layer "Top Layer-No Net" (solid, pour order 1000): 38.775,54.025 43.974,54.025 43.974,42.775 44,42.75 38.775,42.75 38.775,54.025
+24V on Top Layer "Top Layer-No Net" (solid, pour order 1001): 43.9,48.5 53.499,48.5 53.524,48.475 53.6,48.4 53.6,44 43.976,44 43.925,44.05 43.9,44.075 43.9,48.5
+24V on Top Layer "Top Layer-No Net" (solid, pour order 1002): 49.85,44 49.85,36.225 53.6,36.225 53.6,44 49.85,44
NetD27_2 on Top Layer "Top Layer-No Net" (solid, pour order 1003): 46.7,62.45 46.7,51.075 54.45,51.075 54.45,62.45 46.7,62.45
NetD27_2 on Top Layer "Top Layer-No Net" (solid, pour order 1004): 51.45,67.575 51.45,50.9 62.925,50.9 62.925,67.55 62.95,67.575 51.45,67.575
+5V on Top Layer "Top Layer-No Net" (solid, pour order 1005): 35.775,66.45 35.775,59.75 38.625,59.75 38.625,66.45 35.775,66.45
+5V on Top Layer "Top Layer-No Net" (solid, pour order 1006): 38.625,70.125 38.625,62.775 45.125,62.775 45.125,70.125
+5V on Top Layer "Top Layer-No Net" (solid, pour order 1007): 45.15,70.075 45.15,63.975 50.15,63.975 50.15,70.075 45.15,70.075
+5V on Top Layer "Top Layer-No Net" (solid, pour order 1008): 46.3,74.85 46.3,69.075 46.353,69.125 62.875,69.125 62.875,74.875 62.849,74.85 46.3,74.85
+3.3V on Top Layer "Top Layer-No Net" (solid, pour order 1009): 64.625,76.5 64.625,64.5 70.375,64.5 70.375,76.5 64.625,76.5
+3.3V on Top Layer "Top Layer-No Net" (solid, pour order 1010): 35.825,83 35.825,76.728 35.857,76.7 44.625,76.7 44.625,83 35.825,83
+3.3V on Top Layer "Top Layer-No Net" (solid, pour order 1011): 43.875,78.85 43.875,76.701 43.941,76.6 49.375,76.6 49.375,78.816 49.353,78.85 43.875,78.85
+3.3V on Top Layer "Top Layer-No Net" (solid, pour order 1012): 45.725,78.675 45.725,75.748 45.752,75.725 67.6,75.725 67.6,78.652 67.573,78.675 45.725,78.675
GND on Top Layer "Top Layer-No Net" (solid, pour order 1013): 37.802,75.5 37.802,71.55 37.75,71.5 37.829,71.425 44.9,71.425 44.9,75.5 37.802,75.5
+5V on Top Layer "Top Layer-No Net" (solid, pour order 1014): 69.625,63.675 69.625,58.625 71,58.625 71,63.675 69.625,63.675
+5V on Top Layer "Top Layer-No Net" (solid, pour order 1015): 71,65.75 71,62.375 73.75,62.375 73.75,65.75 71,65.75
GND on Top Layer "Top Layer-No Net" (solid, pour order 1016): 41.525,62.125 41.525,59.75 45.45,59.75 45.45,62.125 41.525,62.125
GND on Top Layer "Top Layer-No Net" (solid, pour order 1017): 35.4,41.575 35.4,36.875 36.35,35.925 36.85,35.425 38.85,35.425 48.625,35.425 48.625,41.55 35.425,41.55 35.4,41.575
GND on Top Layer "Top Layer-No Net" (solid, pour order 1018): 35.4,54 35.45,54.05 37.825,54.05 37.825,41.55 35.425,41.55 35.425,53.975 35.4,54
GND on Top Layer "Top Layer-No Net" (solid, pour order 1019): 63.975,61.45 66.375,61.45 66.375,52.125 63.975,52.125 63.975,61.45
GND on Top Layer "Top Layer-No Net" (hatched 90Degree grid 0 track 0.203, pour order 1020): 45.775,81.475 49.175,81.475 49.175,82.85 45.775,82.85 45.775,81.475
+5V on Bottom Layer "Top Layer-No Net" (solid, pour order 1021): 60.225,74.85 60.225,61.85 60.25,61.825 65.7,61.825 65.7,74.8 65.65,74.85 60.225,74.85
+5V on Bottom Layer "Top Layer-No Net" (solid, pour order 1022): 65.7,65.75 65.7,62.375 73.75,62.375 73.75,65.75 65.7,65.75
+5V on Bottom Layer "Top Layer-No Net" (solid, pour order 1023): 51.225,74.875 51.225,69.15 51.3,69.075 60.3,69.075 60.3,74.825 60.35,74.875 51.225,74.875
NetD27_2 on Bottom Layer "Top Layer-No Net" (solid, pour order 1024): 51.425,67.6 51.425,56.25 51.5,56.325 57.9,56.325 57.9,67.575 57.875,67.6 51.425,67.6
NetD27_2 on Bottom Layer "Top Layer-No Net" (solid, pour order 1025): 57.9,60.225 57.9,56.356 57.906,56.35 62.95,56.35 62.95,60.175 62.9,60.225 57.9,60.225
GND on Bottom Layer "Top Layer-No Net" (hatched 90Degree grid 0 track 0.203, pour order 1026): 63.924,61.475 63.9,61.45 63.9,55.27 71.124,55.27 71.152,55.3 71.225,55.375 71.225,61.45 63.949,61.45 63.924,61.475
GND on Bottom Layer "Top Layer-No Net" (hatched 90Degree grid 0 track 0.203, pour order 1027): 36.029,56.125 35.475,55.571 35.475,36.9 35.475,36.85 36.875,35.45 64.975,35.45 64.975,55.808 64.7,56.083 64.583,56.2 36.029,56.2
GND on Bottom Layer "Top Layer-No Net" (hatched 90Degree grid 0 track 0.203, pour order 1028): 35.425,68.8 50.525,68.8 50.6,68.875 50.525,68.8 50.525,55.067 35.483,55.067 35.425,55.125 35.425,68.8
GND on Bottom Layer "Top Layer-No Net" (hatched 90Degree grid 0 track 0.203, pour order 1029): 49.95,78.209 49.95,75.59 67.065,75.59 67.175,75.696 67.154,75.716 67.154,78.275 50.172,78.275 50.025,78.133
GND on Bottom Layer "Top Layer-No Net" (hatched 90Degree grid 0 track 0.203, pour order 1030): 64.7,55.677 64.637,55.614 64.637,49.655 68.33,49.655 68.45,49.775 68.225,50 68.225,55.575 64.852,55.575 64.75,55.677
GND on Bottom Layer "Top Layer-No Net" (hatched 90Degree grid 0 track 0.203, pour order 1031): 65.775,75.997 65.8,75.972 65.8,68.1 65.8,65.6 65.925,65.475 66.125,65.675 74.75,65.675 74.75,75.675 74.675,75.75 74.428,75.997 65.8,75.997
GND on Bottom Layer "Top Layer-No Net" (hatched 90Degree grid 0 track 0.203, pour order 1032): 35.55,81.446 35.55,68.325 50.625,68.325 50.625,82.875 37.05,82.875 35.55,81.446
GND on Bottom Layer "Top Layer-No Net" (hatched 90Degree grid 0 track 0.203, pour order 1033): 50.875,82.775 50.8,82.7 50.8,77.925 62.217,77.925 62.992,77.15 62.875,77.267 62.875,82.45 51.2,82.45 50.875,82.775
GND on Bottom Layer "Top Layer-No Net" (hatched 90Degree grid 0 track 0.203, pour order 1034): 37.575,83.053 37.497,82.977 37.497,82.285 50.198,82.285 50.209,82.296 50.05,82.45 50.05,83.15 37.675,83.15 37.575,83.053
GND on Bottom Layer "Top Layer-No Net" (hatched 90Degree grid 0 track 0.203, pour order 1035): 73.971,73.205 73.971,66.65 74.575,66.65 74.7,66.525 74.75,66.575 74.75,73.2 73.976,73.2 73.971,73.205
GND on Bottom Layer "Top Layer-No Net" (hatched 90Degree grid 0 track 0.203, pour order 1036): 35.6,36.17 35.7,36.056 35.7,35.425 63.885,35.425 63.989,35.543 64.175,35.755 64.175,36.14 35.626,36.14 35.6,36.17
GND on Bottom Layer "Top Layer-No Net" (hatched 90Degree grid 0 track 0.203, pour order 1037): 35.475,61.175 35.5,61.15 35.5,35.851 36.1,35.851 36.2,35.75 36.17,35.781 36.17,61.14 35.51,61.14 35.475,61.175

## Keep-outs
Keep-Out Layer:
  lines w0.254: 28.492,36.524 29,35 ; 28.492,56.476 29,58 ; 28.746,35 29.254,35 ; 28.746,58 29.254,58 ; 29,41.396 29,35 ; 29,51.604 29,58 ; 29.508,36.524 29,35 ; 29.508,56.476 29,58 ; 32.492,36.524 33,35 ; 32.492,82.476 33,84 ; 32.746,35 33.254,35 ; 32.746,84 33.254,84 ; 33,54.396 33,35 ; 33,64.604 33,84 ; 33.508,36.524 33,35 ; 33.508,82.476 33,84 ; 35,85.746 35,86.254 ; 36.524,85.492 35,86 ; 36.524,86.508 35,86 ; 49.896,86 35,86 ; 60.104,86 75,86 ; 73.476,85.492 75,86 ; 73.476,86.508 75,86 ; 75,85.746 75,86.254 ; 78.492,36.524 79,35 ; 78.492,78.476 79,80 ; 78.746,35 79.254,35 ; 78.746,80 79.254,80 ; 79,52.396 79,35 ; 79,62.604 79,80 ; 79.508,36.524 79,35 ; 79.508,78.476 79,80 ; 35,37 ccw(c37,37) 37,35 73,35 ccw(c73,37) 75,37 75,82 ccw(c73,82) 73,84 37,84 ccw(c37,82) 35,82 35,37
  text "40 (mm)" at 50.15,85.086 h1.52
  text "49 (mm)" at 33.914,54.65 h1.52 r90
  text "45 (mm)" at 79.914,52.65 h1.52 r90
  text "23 (mm)" at 29.914,41.65 h1.52 r90

## Silkscreen, mask and mechanical layers (free items; w line width, h text height)
Top Overlay:
  text "+3.3V" at 38.475,82 h1 r270
  text "+5V" at 50.65,76.075 h1
  text "+3.3V" at 55.7,76.075 h1
  text "SYS" at 62.25,76.05 h1
  text "+5V" at 38.275,65.95 h1 r270
  text "+" at 75,43.05 h1.5 r90
  text "-" at 75,37.325 h1.5 r90
Bottom Overlay:
  text "RUYI POWER V3.0" at 40.925,52.675 h1.52
Top Solder:
  lines w2: 36.834,65.532 41.782,65.532 41.925,65.675 ; 41.6,77.65 48.65,77.65 48.7,77.7 ; 44.375,66.7 44.875,67.2 46.05,67.2 ; 46.15,67.375 46.175,67.375 49.85,71.05 49.925,71.05 51.275,72.4 51.35,72.4 51.85,72.9 ; 57,47.2 57,47.275 59,49.275 63.825,49.275 64.825,48.275 64.825,47.775 ; 66.275,74.65 66.3,74.675 66.3,77.4